# Altium PCB BuySellDisplay.PcbDoc (part 2 of 2)
Units mil, origin at the board's own origin, x right, y up, seen from the top; angles counter-clockwise.
Board outline 6000 x 4000 mil, 2 copper layers (Top Layer, Bottom Layer); 218 components, 207 nets, 568 pads, 108 vias.
Unrouted connection lines stored in the file: 273.
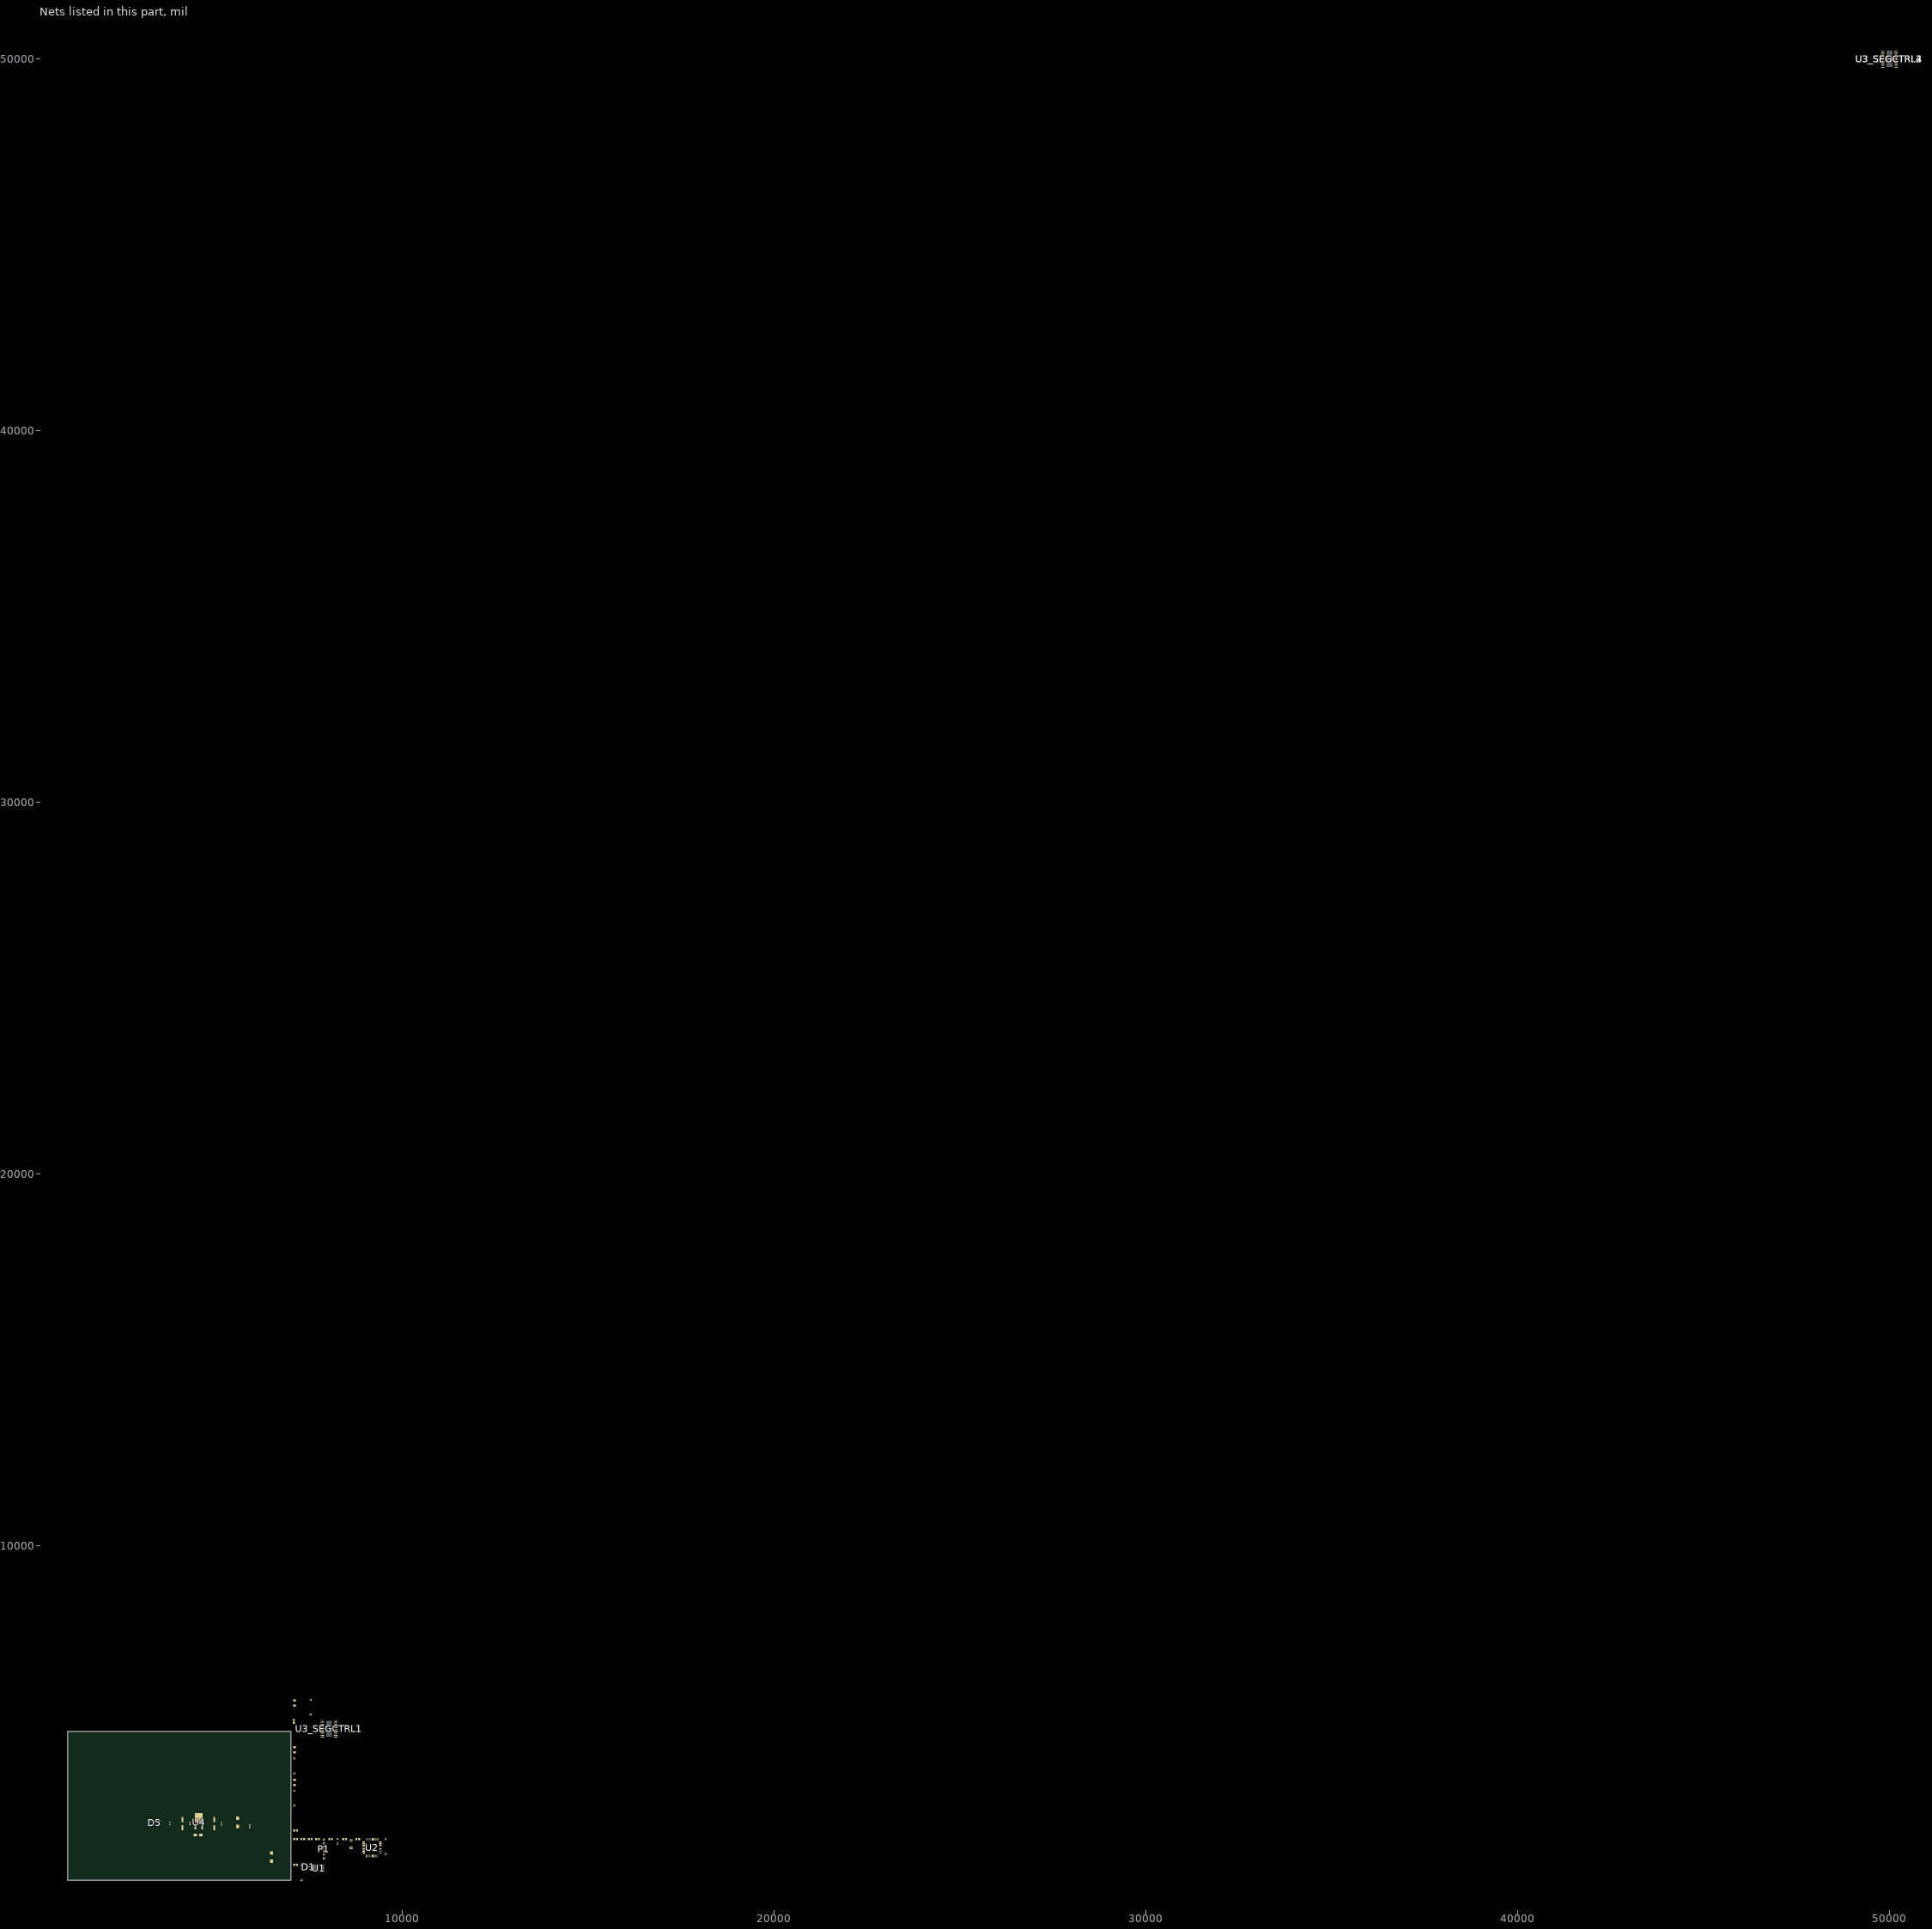
[diagram p2: the nets of this part, all layers, seen from the top]

## Components (designator, comment, footprint, x,y, rotation, side; value= is the part's Value field where it differs from the comment) (continued)
D2_DOT89 "LED2" 3.2X1.6X1.1 49999.5,49999.5 r0 top (schematic designator D2)
D2_DOT90 "LED2" 3.2X1.6X1.1 49999.5,49999.5 r0 top (schematic designator D2)
D2_DOT91 "LED2" 3.2X1.6X1.1 49999.5,49999.5 r0 top (schematic designator D2)
D2_DOT92 "LED2" 3.2X1.6X1.1 49999.5,49999.5 r0 top (schematic designator D2)
D2_DOT93 "LED2" 3.2X1.6X1.1 49999.5,49999.5 r0 top (schematic designator D2)
D2_DOT94 "LED2" 3.2X1.6X1.1 49999.5,49999.5 r0 top (schematic designator D2)
D2_DOT95 "LED2" 3.2X1.6X1.1 49999.5,49999.5 r0 top (schematic designator D2)
D2_DOT96 "LED2" 3.2X1.6X1.1 49999.5,49999.5 r0 top (schematic designator D2)
D2_DOT97 "LED2" 3.2X1.6X1.1 49999.5,49999.5 r0 top (schematic designator D2)
D2_DOT98 "LED2" 3.2X1.6X1.1 49999.5,49999.5 r0 top (schematic designator D2)
D2_DOT99 "LED2" 3.2X1.6X1.1 49999.5,49999.5 r0 top (schematic designator D2)
D2_DOT100 "LED2" 3.2X1.6X1.1 49999.5,49999.5 r0 top (schematic designator D2)
D2_DOT101 "LED2" 3.2X1.6X1.1 49999.5,49999.5 r0 top (schematic designator D2)
D2_DOT102 "LED2" 3.2X1.6X1.1 49999.5,49999.5 r0 top (schematic designator D2)
D2_DOT103 "LED2" 3.2X1.6X1.1 49999.5,49999.5 r0 top (schematic designator D2)
D2_DOT104 "LED2" 3.2X1.6X1.1 49999.5,49999.5 r0 top (schematic designator D2)
D2_DOT105 "LED2" 3.2X1.6X1.1 49999.5,49999.5 r0 top (schematic designator D2)
D2_DOT106 "LED2" 3.2X1.6X1.1 49999.5,49999.5 r0 top (schematic designator D2)
D2_DOT107 "LED2" 3.2X1.6X1.1 49999.5,49999.5 r0 top (schematic designator D2)
D2_DOT108 "LED2" 3.2X1.6X1.1 49999.5,49999.5 r0 top (schematic designator D2)
D2_DOT109 "LED2" 3.2X1.6X1.1 49999.5,49999.5 r0 top (schematic designator D2)
D2_DOT110 "LED2" 3.2X1.6X1.1 49999.5,49999.5 r0 top (schematic designator D2)
D2_DOT111 "LED2" 3.2X1.6X1.1 49999.5,49999.5 r0 top (schematic designator D2)
D2_DOT112 "LED2" 3.2X1.6X1.1 49999.5,49999.5 r0 top (schematic designator D2)
D2_DOT113 "LED2" 3.2X1.6X1.1 49999.5,49999.5 r0 top (schematic designator D2)
D2_DOT114 "LED2" 3.2X1.6X1.1 49999.5,49999.5 r0 top (schematic designator D2)
D2_DOT115 "LED2" 3.2X1.6X1.1 49999.5,49999.5 r0 top (schematic designator D2)
D2_DOT116 "LED2" 3.2X1.6X1.1 49999.5,49999.5 r0 top (schematic designator D2)
D2_DOT117 "LED2" 3.2X1.6X1.1 49999.5,49999.5 r0 top (schematic designator D2)
D2_DOT118 "LED2" 3.2X1.6X1.1 49999.5,49999.5 r0 top (schematic designator D2)
D2_DOT119 "LED2" 3.2X1.6X1.1 49999.5,49999.5 r0 top (schematic designator D2)
D2_DOT120 "LED2" 3.2X1.6X1.1 49999.5,49999.5 r0 top (schematic designator D2)
D2_DOT121 "LED2" 3.2X1.6X1.1 49999.5,49999.5 r0 top (schematic designator D2)
D2_DOT122 "LED2" 3.2X1.6X1.1 49999.5,49999.5 r0 top (schematic designator D2)
D2_DOT123 "LED2" 3.2X1.6X1.1 49999.5,49999.5 r0 top (schematic designator D2)
D2_DOT124 "LED2" 3.2X1.6X1.1 49999.5,49999.5 r0 top (schematic designator D2)
D2_DOT125 "LED2" 3.2X1.6X1.1 49999.5,49999.5 r0 top (schematic designator D2)
D2_DOT126 "LED2" 3.2X1.6X1.1 49999.5,49999.5 r0 top (schematic designator D2)
D2_DOT127 "LED2" 3.2X1.6X1.1 49999.5,49999.5 r0 top (schematic designator D2)
D2_DOT128 "LED2" 3.2X1.6X1.1 49999.5,49999.5 r0 top (schematic designator D2)
D2_DOT129 "LED2" 3.2X1.6X1.1 49999.5,49999.5 r0 top (schematic designator D2)
D2_DOT130 "LED2" 3.2X1.6X1.1 49999.5,49999.5 r0 top (schematic designator D2)
D2_DOT131 "LED2" 3.2X1.6X1.1 49999.5,49999.5 r0 top (schematic designator D2)
D2_DOT132 "LED2" 3.2X1.6X1.1 49999.5,49999.5 r0 top (schematic designator D2)
D2_DOT133 "LED2" 3.2X1.6X1.1 49999.5,49999.5 r0 top (schematic designator D2)
D2_DOT134 "LED2" 3.2X1.6X1.1 49999.5,49999.5 r0 top (schematic designator D2)
D2_DOT135 "LED2" 3.2X1.6X1.1 49999.5,49999.5 r0 top (schematic designator D2)
D2_DOT136 "LED2" 3.2X1.6X1.1 49999.5,49999.5 r0 top (schematic designator D2)
D2_DOT137 "LED2" 3.2X1.6X1.1 49999.5,49999.5 r0 top (schematic designator D2)
D2_DOT138 "LED2" 3.2X1.6X1.1 49999.5,49999.5 r0 top (schematic designator D2)
D2_DOT139 "LED2" 3.2X1.6X1.1 49999.5,49999.5 r0 top (schematic designator D2)
D2_DOT140 "LED2" 3.2X1.6X1.1 49999.5,49999.5 r0 top (schematic designator D2)
D2_DOT141 "LED2" 3.2X1.6X1.1 49999.5,49999.5 r0 top (schematic designator D2)
D2_DOT142 "LED2" 3.2X1.6X1.1 49999.5,49999.5 r0 top (schematic designator D2)
D2_DOT143 "LED2" 3.2X1.6X1.1 49999.5,49999.5 r0 top (schematic designator D2)
D2_DOT144 "LED2" 3.2X1.6X1.1 49999.5,49999.5 r0 top (schematic designator D2)
D3_IND1 "LED2" 3.2X1.6X1.1 7100,5765 r90 top (schematic designator D3)
D3_IND2 "LED2" 3.2X1.6X1.1 49999.5,49999.5 r0 top (schematic designator D3)
D3_IND3 "LED2" 3.2X1.6X1.1 49999.5,49999.5 r0 top (schematic designator D3)
D4 "S1M-E3/5AT" S1M-E3/5AT 4510,2215 r0 top
D5 "MB6S-E3/80" MB6S-E3/80 3345,2545 r0 top
D6 "150060YS75000" 150060YS75000 3745,2525 r270 top
D7 "SMBJ12A-E3/52" SMBJ5.0A 6480,1620 r90 top
D8 "SMBJ5.0A" SMBJ5.0A 5570,2555 r270 top
P1 "Header 6" HDR1X6 7890,1590 r90 top
R1 "Res2" AXIAL-0.4 7290,1205 r90 top
R2 "Res2" AXIAL-0.4 9550,1905 r90 top
R3_IND1 "Res2" AXIAL-0.4 7535,5655 r90 top (schematic designator R3)
R3_IND2 "Res2" AXIAL-0.4 49999.5,49999.5 r0 top (schematic designator R3)
R3_IND3 "Res2" AXIAL-0.4 49999.5,49999.5 r0 top (schematic designator R3)
R4_7SEG1 "Res2" AXIAL-0.4 7095,3205 r90 top (schematic designator R4)
R4_7SEG2 "Res2" AXIAL-0.4 49999.5,49999.5 r0 top (schematic designator R4)
R4_7SEG3 "Res2" AXIAL-0.4 49999.5,49999.5 r0 top (schematic designator R4)
R4_7SEG4 "Res2" AXIAL-0.4 49999.5,49999.5 r0 top (schematic designator R4)
R5_L1 "Res2" AXIAL-0.4 7095,4075 r90 top (schematic designator R5)
R5_L2 "Res2" AXIAL-0.4 49999.5,49999.5 r0 top (schematic designator R5)
R5_L3 "Res2" AXIAL-0.4 49999.5,49999.5 r0 top (schematic designator R5)
R5_L4 "Res2" AXIAL-0.4 49999.5,49999.5 r0 top (schematic designator R5)
R5_L5 "Res2" AXIAL-0.4 49999.5,49999.5 r0 top (schematic designator R5)
R5_L6 "Res2" AXIAL-0.4 49999.5,49999.5 r0 top (schematic designator R5)
R5_L7 "Res2" AXIAL-0.4 49999.5,49999.5 r0 top (schematic designator R5)
R5_L8 "Res2" AXIAL-0.4 49999.5,49999.5 r0 top (schematic designator R5)
R5_L9 "Res2" AXIAL-0.4 49999.5,49999.5 r0 top (schematic designator R5)
R5_L10 "Res2" AXIAL-0.4 49999.5,49999.5 r0 top (schematic designator R5)
R5_L11 "Res2" AXIAL-0.4 49999.5,49999.5 r0 top (schematic designator R5)
R5_L12 "Res2" AXIAL-0.4 49999.5,49999.5 r0 top (schematic designator R5)
R5_L13 "Res2" AXIAL-0.4 49999.5,49999.5 r0 top (schematic designator R5)
R5_L14 "Res2" AXIAL-0.4 49999.5,49999.5 r0 top (schematic designator R5)
R5_L15 "Res2" AXIAL-0.4 49999.5,49999.5 r0 top (schematic designator R5)
R5_L16 "Res2" AXIAL-0.4 49999.5,49999.5 r0 top (schematic designator R5)
R5_L17 "Res2" AXIAL-0.4 49999.5,49999.5 r0 top (schematic designator R5)
R5_L18 "Res2" AXIAL-0.4 49999.5,49999.5 r0 top (schematic designator R5)
R5_L19 "Res2" AXIAL-0.4 49999.5,49999.5 r0 top (schematic designator R5)
R5_L20 "Res2" AXIAL-0.4 49999.5,49999.5 r0 top (schematic designator R5)
R5_L21 "Res2" AXIAL-0.4 49999.5,49999.5 r0 top (schematic designator R5)
R5_L22 "Res2" AXIAL-0.4 49999.5,49999.5 r0 top (schematic designator R5)
R5_L23 "Res2" AXIAL-0.4 49999.5,49999.5 r0 top (schematic designator R5)
R5_L24 "Res2" AXIAL-0.4 49999.5,49999.5 r0 top (schematic designator R5)
R5_L25 "Res2" AXIAL-0.4 49999.5,49999.5 r0 top (schematic designator R5)
R5_L26 "Res2" AXIAL-0.4 49999.5,49999.5 r0 top (schematic designator R5)
R5_L27 "Res2" AXIAL-0.4 49999.5,49999.5 r0 top (schematic designator R5)
R5_L28 "Res2" AXIAL-0.4 49999.5,49999.5 r0 top (schematic designator R5)
R6 "CRCW2512470RJNEG" RES0603 5890,2455 r270 top
S1 "SW-PB" SPST-2 8620,1970 r90 top
U1 "MAX485CSA" NSO8_N 7755,1325 r0 top
U2 "ATmega1284P-AU" 44A_N 9185,1875 r0 top
U3_SEGCTRL1 "TPIC6B595" TPIC6B595DWR 8030,5075 r0 top (schematic designator U3)
U3_SEGCTRL2 "TPIC6B595" TPIC6B595DWR 49999.5,49999.5 r0 top (schematic designator U3)
U3_SEGCTRL3 "TPIC6B595" TPIC6B595DWR 49999.5,49999.5 r0 top (schematic designator U3)
U3_SEGCTRL4 "TPIC6B595" TPIC6B595DWR 49999.5,49999.5 r0 top (schematic designator U3)
U4 "MC7805CDTRKG" MC7805CDTRKG 4525,2585 r90 top
Y1 "XTAL" R38 8255,2050 r0 top

## Footprints (in the part's own frame and the unit in brackets; to place one, negate y for a bottom-side part, rotate by r counter-clockwise, add the part's x,y. Pads: shape width x height; smd on the part's side, far side on the other; paste and mask are expansions set on the pad)
3.2X1.6X1.1 [mm] "SMT LED; 2 Flat Leads"
  rect 1.5x1.5 smd: 1(-1.75,0) 2(1.75,0)
  silkscreen extent -2.9,-1.15 3.2,1.15
44A_N [mm] "Thin QFP, 44-Leads, Body 10x10mm, Pitch 0.8mm, IPC Medium Density"
  oval 1.75x0.55 smd: 1(-5.65,4) 2(-5.65,3.2) 3(-5.65,2.4) 4(-5.65,1.6) 5(-5.65,0.8) 6(-5.65,0) 7(-5.65,-0.8) 8(-5.65,-1.6) 9(-5.65,-2.4) 10(-5.65,-3.2) 11(-5.65,-4) 23(5.65,-4) 24(5.65,-3.2) 25(5.65,-2.4) 26(5.65,-1.6) 27(5.65,-0.8) 28(5.65,0) 29(5.65,0.8) 30(5.65,1.6) 31(5.65,2.4) 32(5.65,3.2) 33(5.65,4)
  oval 0.55x1.75 smd: 12(-4,-5.65) 13(-3.2,-5.65) 14(-2.4,-5.65) 15(-1.6,-5.65) 16(-0.8,-5.65) 17(0,-5.65) 18(0.8,-5.65) 19(1.6,-5.65) 20(2.4,-5.65) 21(3.2,-5.65) 22(4,-5.65) 34(4,5.65) 35(3.2,5.65) 36(2.4,5.65) 37(1.6,5.65) 38(0.8,5.65) 39(0,5.65) 40(-0.8,5.65) 41(-1.6,5.65) 42(-2.4,5.65) 43(-3.2,5.65) 44(-4,5.65)
  silkscreen extent -5.77,-4.35 4.35,4.95, body extent -5,-5 5,5, height 1.2
150060YS75000 [mm]
  rect 0.85x0.85 smd: 1(-0.8,0) 2(0.8,0)
  silkscreen extent -1.53,-0.33 -1.53,0.33, body extent -0.85,-0.45 0.85,0.45, height 2.44
AXIAL-0.4 [mm] "Resistor; 2 Leads"
  round 1.4 hole 0.85: 1(-5.08,0) 2(5.08,0)
  silkscreen extent -4.06,-1.02 4.06,1.02
C0805 [mm] "Chip Capacitor; Body 2.0 x 1.2 mm (LxW typ)"
  rect 1.3x1.5 smd: 1(-0.95,0) 2(0.95,0)
  silkscreen extent -1.9,-0.65 -1.9,0.65
CAP0603 [mm] "Capacitores cerámicos de capas múltiples (MLCC) - SMD/SMT 0603 0.1uF 16volts X7R 5%"
  rect 0.9x0.9 smd: 1(-0.8,0) 2(0.8,0)
  silkscreen extent -1.55,-0.35 0.15,0.35, body extent -0.83,-0.43 0.82,0.42, height 0.85
EEH-ZA1E101XP [mm] "EEH-ZA1E101XP"
  rect 3.5x1.2 smd: 1(-2.794,0) 2(2.794,0)
  silkscreen extent -3.5,-3.5 3.5,3.5
HDR1X6 [mm] "Connector; Header; 6 Position"
  rect 1.5x1.5 hole 0.9: 1(0,0)
  round 1.5 hole 0.9: 2(2.54,0) 3(5.08,0) 4(7.62,0) 5(10.16,0) 6(12.7,0)
  silkscreen extent -1.27,-1.27 13.97,1.27
MB6S-E3/80 [mm] "MB6S-E3/80"
  rect 1.7x0.85 smd: 1(-3,1.335) 2(-3,-1.335) 3(3,-1.335) 4(3,1.335)
  silkscreen extent -3.12,-2.45 2.05,2.45, body extent -2.05,-2.47 2.05,2.48, height 2.9
MC7805CDTRKG [mm] "MC7805CDTRKG"
  rect 3.05x1.25 smd: 1(-4.05,2.29) 3(-4.05,-2.29)
  rect 6.5x5.55 smd: 4(2.4,0)
  silkscreen extent -4.17,-3.35 -1.25,3.59, body extent -2.5,-3.37 3.72,3.37, height 2.38
NSO8_N [mm] "SOIC, 8-Leads, Body 4.9x3.9mm, Pitch 1.27mm, IPC Medium Density"
  oval 2.2x0.6 smd: 1(-2.4,1.905) 2(-2.4,0.635) 3(-2.4,-0.635) 4(-2.4,-1.905) 5(2.4,-1.905) 6(2.4,-0.635) 7(2.4,0.635) 8(2.4,1.905)
  silkscreen extent -2.52,-2.5 0.9,2.88, body extent -1.95,-2.45 1.95,2.45, height 1.75
R38 [mm] "Crystal, Thru-Hole; 2 Leads; Body 3.1 x 8.2 mm (Dia.xH)"
  round 1.3 hole 0.7: 1(0,1.55) 2(0,-1.55)
  silkscreen extent -1.55,-1.19 1.55,1.17
RES0603 [mm]
  rect 1x1 smd: 1(-0.85,0) 2(0.85,0)
  silkscreen extent -0.15,-0.4 0.15,0.4, body extent -0.9,-0.45 0.9,0.45, height 0.55
S1M-E3/5AT [mm] "S1M-E3/5AT"
  rect 2.35x1.55 smd: 1(-1.975,0) 2(1.975,0)
  silkscreen extent -3.42,-1.4 2.65,1.45, body extent -2.64,-1.4 2.64,1.39, height 2.29
SMBJ5.0A [mm]
  rect 2.35x2.2 smd: 1(-2.8,0) 2(2.8,0)
  silkscreen extent -3.57,-2 2.8,2, body extent -2.8,-1.97 2.79,1.97, height 2.44
SPST-2 [mm] "Circuit Breaker; 2 Leads"
  rect 1.85x1.85 hole 1.1: 1(-2.54,0)
  round 1.85 hole 1.1: 2(2.54,0)
  silkscreen extent -4.89,-1.27 4.28,1.27
SW712 [mm] "SM712 Series 600W Asymmetrical TVS Diode Array"
  rect 1.6x0.6 smd: 1(-0.9,0.95) 2(-0.9,-0.95) 3(0.9,0)
  silkscreen extent -1.02,-1.5 0.7,1.92, body extent -0.7,-1.52 0.7,1.52, height 1.12
TPIC6B595DWR [mm] "SOIC, 20-Leads, Body 13.0x7.6mm (max), Pitch 1.27mm, IPC Medium Density"
  oval 2.3x0.6 smd: 1(-4.55,5.715) 2(-4.55,4.445) 3(-4.55,3.175) 4(-4.55,1.905) 5(-4.55,0.635) 6(-4.55,-0.635) 7(-4.55,-1.905) 8(-4.55,-3.175) 9(-4.55,-4.445) 10(-4.55,-5.715) 11(4.55,-5.715) 12(4.55,-4.445) 13(4.55,-3.175) 14(4.55,-1.905) 15(4.55,-0.635) 16(4.55,0.635) 17(4.55,1.905) 18(4.55,3.175) 19(4.55,4.445) 20(4.55,5.715)
  rect 3.9x11 smd: 21(0,0)
  silkscreen extent -4.67,-6.5 3,6.69, body extent -3.8,-6.5 3.8,6.5, height 2.65

## Part data
C1 C2 C3 C4 C5 C6 C7 C8 C9 C10_SEGCTRL1 C10_SEGCTRL2 C10_SEGCTRL3 C10_SEGCTRL4: "Polarized Capacitor (Surface Mount)"
C13 C14: library part C0.1UF, "Capacitores cerámicos de capas múltiples (MLCC) - SMD/SMT 0603 0.1uF 16volts X7R 5%"
D2_DOT1 D2_DOT2 D2_DOT3 D2_DOT4 D2_DOT5 D2_DOT6 D2_DOT7 D2_DOT8 D2_DOT9 D2_DOT10 D2_DOT11 D2_DOT12 D2_DOT13 D2_DOT14 D2_DOT15 D2_DOT16 D2_DOT17 D2_DOT18 D2_DOT19 D2_DOT20 D2_DOT21 D2_DOT22 D2_DOT23 D2_DOT24 D2_DOT25 D2_DOT26 D2_DOT27 D2_DOT28 D2_DOT29 D2_DOT30 D2_DOT31 D2_DOT32 D2_DOT33 D2_DOT34 D2_DOT35 D2_DOT36 D2_DOT37 D2_DOT38 D2_DOT39 D2_DOT40 D2_DOT41 D2_DOT42 D2_DOT43 D2_DOT44 D2_DOT45 D2_DOT46 D2_DOT47 D2_DOT48 D2_DOT49 D2_DOT50 D2_DOT51 D2_DOT52 D2_DOT53 D2_DOT54 D2_DOT55 D2_DOT56 D2_DOT57 D2_DOT58 D2_DOT59 D2_DOT60 D2_DOT61 D2_DOT62 D2_DOT63 D2_DOT64 D2_DOT65 D2_DOT66 D2_DOT67 D2_DOT68 D2_DOT69 D2_DOT70 D2_DOT71 D2_DOT72 D2_DOT73 D2_DOT74 D2_DOT75 D2_DOT76 D2_DOT77 D2_DOT78 D2_DOT79 D2_DOT80 D2_DOT81 D2_DOT82 D2_DOT83 D2_DOT84 D2_DOT85 D2_DOT86 D2_DOT87 D2_DOT88 D2_DOT89 D2_DOT90 D2_DOT91 D2_DOT92 D2_DOT93 D2_DOT94 D2_DOT95 D2_DOT96 D2_DOT97 D2_DOT98 D2_DOT99 D2_DOT100 D2_DOT101 D2_DOT102 D2_DOT103 D2_DOT104 D2_DOT105 D2_DOT106 D2_DOT107 D2_DOT108 D2_DOT109 D2_DOT110 D2_DOT111 D2_DOT112 D2_DOT113 D2_DOT114 D2_DOT115 D2_DOT116 D2_DOT117 D2_DOT118 D2_DOT119 D2_DOT120 D2_DOT121 D2_DOT122 D2_DOT123 D2_DOT124 D2_DOT125 D2_DOT126 D2_DOT127 D2_DOT128 D2_DOT129 D2_DOT130 D2_DOT131 D2_DOT132 D2_DOT133 D2_DOT134 D2_DOT135 D2_DOT136 D2_DOT137 D2_DOT138 D2_DOT139 D2_DOT140 D2_DOT141 D2_DOT142 D2_DOT143 D2_DOT144 D3_IND1 D3_IND2 D3_IND3: "Typical RED, GREEN, YELLOW, AMBER GaAs LED"
D6: library part SMBJ12A-E3/52, "NPN General Purpose Amplifier"
D7 D8: "NPN General Purpose Amplifier"
P1: "Header, 6-Pin"
R1 R2 R3_IND1 R3_IND2 R3_IND3 R4_7SEG1 R4_7SEG2 R4_7SEG3 R4_7SEG4 R5_L1 R5_L2 R5_L3 R5_L4 R5_L5 R5_L6 R5_L7 R5_L8 R5_L9 R5_L10 R5_L11 R5_L12 R5_L13 R5_L14 R5_L15 R5_L16 R5_L17 R5_L18 R5_L19 R5_L20 R5_L21 R5_L22 R5_L23 R5_L24 R5_L25 R5_L26 R5_L27 R5_L28: "Resistor"
S1: "Switch"
U1: "Low-Power, Slew-Rate-Limited RS-485/RS-422 Transceiver"
U2: "20 MHz 8-bit AVR Microcontroller with 128KB Flash, 44-Pin TQFP Pkg, Industrial Temp"
U3_SEGCTRL1 U3_SEGCTRL2 U3_SEGCTRL3 U3_SEGCTRL4: library part TPIC6B595DWR, "HIGH POWER SHIFT REGISTER"
Y1: "Crystal Oscillator"

## Via types
v1: diameter 25.98, hole 12.99, Top Layer to Bottom Layer, tented top, 108 vias

## Nets (pads, with @x,y where several pads share a name; then routed paths per layer and width w, separated by ;. In a path a pad name is that pad's centre, name@x,y a point inside that pad or via, vN(x,y) a via of type N, cw(c..) or ccw(c..) an arc to the next point about the centre after c; other vN are vias at no path point)
20MHZ_1: C3.1 U2.8 Y1.2
20MHZ_2: C4.1 U2.7 Y1.1
A: D1.1 U1.6
B: D1.2 U1.7
CLK: P1.3 U2.3 U3_SEGCTRL1.13 U3_SEGCTRL2.13 U3_SEGCTRL3.13 U3_SEGCTRL4.13
COM_485_EN: R1.1 U1.2 U1.3 U2.34
DI: D3_IND1.2 U1.4 U2.10
DOT_7SEG1: R4_7SEG1.2 U3_SEGCTRL1.17
DOT_7SEG2: R4_7SEG2.2 U3_SEGCTRL2.17
DOT_7SEG3: R4_7SEG3.2 U3_SEGCTRL3.17
DOT_7SEG4: R4_7SEG4.2 U3_SEGCTRL4.17
EXTSUPP: C9.1 C11.1 C13.1 D2_DOT1.1 D2_DOT6.1 D2_DOT11.1 D2_DOT16.1 D2_DOT21.1 D2_DOT26.1 D2_DOT31.1 D2_DOT36.1 D2_DOT37.1 D2_DOT42.1 D2_DOT47.1 D2_DOT52.1 D2_DOT57.1 D2_DOT62.1 D2_DOT67.1 D2_DOT72.1 D2_DOT73.1 D2_DOT78.1 D2_DOT83.1 D2_DOT88.1 D2_DOT93.1 D2_DOT98.1 D2_DOT103.1 D2_DOT108.1 D2_DOT109.1 D2_DOT114.1 D2_DOT119.1 D2_DOT124.1 D2_DOT129.1 D2_DOT134.1 D2_DOT139.1 D2_DOT144.1 D4.1 D5.4 D6.1 D7.1 U4.1
GND: C1.2 C2.2 C3.2 C4.2 C5.2 C6.2 C7.2 C8.2 C9.2 C10_SEGCTRL1.2 C10_SEGCTRL2.2 C10_SEGCTRL3.2 C10_SEGCTRL4.2 C11.2 C12.2 C13.2 C14.2 D1.3 D5.3 D7.2 D8.2 P1.6 R1.2 R6.2 S1.2 U1.5 U2.6 U2.18 U2.28 U2.39 U3_SEGCTRL1.9 U3_SEGCTRL1.10 U3_SEGCTRL1.11 U3_SEGCTRL1.19 U3_SEGCTRL2.9 U3_SEGCTRL2.10 U3_SEGCTRL2.11 U3_SEGCTRL2.19 U3_SEGCTRL3.9 U3_SEGCTRL3.10 U3_SEGCTRL3.11 U3_SEGCTRL3.19 U3_SEGCTRL4.9 U3_SEGCTRL4.10 U3_SEGCTRL4.11 U3_SEGCTRL4.19 U4.4
IND: D3_IND3.2 U2.19
INPUT: P1.1 U2.1 U3_SEGCTRL4.3
MISO: P1.2 U2.2 U3_SEGCTRL1.18
NetD2_DOT1_2: D2_DOT1.2 R4_7SEG1.1
NetD2_DOT2_1: D2_DOT2.1 D2_DOT3.2
NetD2_DOT2_2: D2_DOT2.2 R5_L1.1
NetD2_DOT3_1: D2_DOT3.1 D2_DOT4.2
NetD2_DOT4_1: D2_DOT4.1 D2_DOT5.2
NetD2_DOT5_1: D2_DOT5.1 D2_DOT6.2
NetD2_DOT7_1: D2_DOT7.1 D2_DOT8.2
NetD2_DOT7_2: D2_DOT7.2 R5_L2.1
NetD2_DOT8_1: D2_DOT8.1 D2_DOT9.2
NetD2_DOT9_1: D2_DOT9.1 D2_DOT10.2
NetD2_DOT10_1: D2_DOT10.1 D2_DOT11.2
NetD2_DOT12_1: D2_DOT12.1 D2_DOT13.2
NetD2_DOT12_2: D2_DOT12.2 R5_L3.1
NetD2_DOT13_1: D2_DOT13.1 D2_DOT14.2
NetD2_DOT14_1: D2_DOT14.1 D2_DOT15.2
NetD2_DOT15_1: D2_DOT15.1 D2_DOT16.2
NetD2_DOT17_1: D2_DOT17.1 D2_DOT18.2
NetD2_DOT17_2: D2_DOT17.2 R5_L4.1
NetD2_DOT18_1: D2_DOT18.1 D2_DOT19.2
NetD2_DOT19_1: D2_DOT19.1 D2_DOT20.2
NetD2_DOT20_1: D2_DOT20.1 D2_DOT21.2
NetD2_DOT22_1: D2_DOT22.1 D2_DOT23.2
NetD2_DOT22_2: D2_DOT22.2 R5_L5.1
NetD2_DOT23_1: D2_DOT23.1 D2_DOT24.2
NetD2_DOT24_1: D2_DOT24.1 D2_DOT25.2
NetD2_DOT25_1: D2_DOT25.1 D2_DOT26.2
NetD2_DOT27_1: D2_DOT27.1 D2_DOT28.2
NetD2_DOT27_2: D2_DOT27.2 R5_L6.1
NetD2_DOT28_1: D2_DOT28.1 D2_DOT29.2
NetD2_DOT29_1: D2_DOT29.1 D2_DOT30.2
NetD2_DOT30_1: D2_DOT30.1 D2_DOT31.2
NetD2_DOT32_1: D2_DOT32.1 D2_DOT33.2
NetD2_DOT32_2: D2_DOT32.2 R5_L7.1
NetD2_DOT33_1: D2_DOT33.1 D2_DOT34.2
NetD2_DOT34_1: D2_DOT34.1 D2_DOT35.2
NetD2_DOT35_1: D2_DOT35.1 D2_DOT36.2
NetD2_DOT37_2: D2_DOT37.2 R4_7SEG2.1
NetD2_DOT38_1: D2_DOT38.1 D2_DOT39.2
NetD2_DOT38_2: D2_DOT38.2 R5_L8.1
NetD2_DOT39_1: D2_DOT39.1 D2_DOT40.2
NetD2_DOT40_1: D2_DOT40.1 D2_DOT41.2
NetD2_DOT41_1: D2_DOT41.1 D2_DOT42.2
NetD2_DOT43_1: D2_DOT43.1 D2_DOT44.2
NetD2_DOT43_2: D2_DOT43.2 R5_L9.1
NetD2_DOT44_1: D2_DOT44.1 D2_DOT45.2
NetD2_DOT45_1: D2_DOT45.1 D2_DOT46.2
NetD2_DOT46_1: D2_DOT46.1 D2_DOT47.2
NetD2_DOT48_1: D2_DOT48.1 D2_DOT49.2
NetD2_DOT48_2: D2_DOT48.2 R5_L10.1
NetD2_DOT49_1: D2_DOT49.1 D2_DOT50.2
NetD2_DOT50_1: D2_DOT50.1 D2_DOT51.2
NetD2_DOT51_1: D2_DOT51.1 D2_DOT52.2
NetD2_DOT53_1: D2_DOT53.1 D2_DOT54.2
NetD2_DOT53_2: D2_DOT53.2 R5_L11.1
NetD2_DOT54_1: D2_DOT54.1 D2_DOT55.2
NetD2_DOT55_1: D2_DOT55.1 D2_DOT56.2
NetD2_DOT56_1: D2_DOT56.1 D2_DOT57.2
NetD2_DOT58_1: D2_DOT58.1 D2_DOT59.2
NetD2_DOT58_2: D2_DOT58.2 R5_L12.1
NetD2_DOT59_1: D2_DOT59.1 D2_DOT60.2
NetD2_DOT60_1: D2_DOT60.1 D2_DOT61.2
NetD2_DOT61_1: D2_DOT61.1 D2_DOT62.2
NetD2_DOT63_1: D2_DOT63.1 D2_DOT64.2
NetD2_DOT63_2: D2_DOT63.2 R5_L13.1
NetD2_DOT64_1: D2_DOT64.1 D2_DOT65.2
NetD2_DOT65_1: D2_DOT65.1 D2_DOT66.2
NetD2_DOT66_1: D2_DOT66.1 D2_DOT67.2
NetD2_DOT68_1: D2_DOT68.1 D2_DOT69.2
NetD2_DOT68_2: D2_DOT68.2 R5_L14.1
NetD2_DOT69_1: D2_DOT69.1 D2_DOT70.2
NetD2_DOT70_1: D2_DOT70.1 D2_DOT71.2
NetD2_DOT71_1: D2_DOT71.1 D2_DOT72.2
NetD2_DOT73_2: D2_DOT73.2 R4_7SEG3.1
NetD2_DOT74_1: D2_DOT74.1 D2_DOT75.2
NetD2_DOT74_2: D2_DOT74.2 R5_L15.1
NetD2_DOT75_1: D2_DOT75.1 D2_DOT76.2
NetD2_DOT76_1: D2_DOT76.1 D2_DOT77.2
NetD2_DOT77_1: D2_DOT77.1 D2_DOT78.2
NetD2_DOT79_1: D2_DOT79.1 D2_DOT80.2
NetD2_DOT79_2: D2_DOT79.2 R5_L16.1
NetD2_DOT80_1: D2_DOT80.1 D2_DOT81.2
NetD2_DOT81_1: D2_DOT81.1 D2_DOT82.2
NetD2_DOT82_1: D2_DOT82.1 D2_DOT83.2
NetD2_DOT84_1: D2_DOT84.1 D2_DOT85.2
NetD2_DOT84_2: D2_DOT84.2 R5_L17.1
NetD2_DOT85_1: D2_DOT85.1 D2_DOT86.2
NetD2_DOT86_1: D2_DOT86.1 D2_DOT87.2
NetD2_DOT87_1: D2_DOT87.1 D2_DOT88.2
NetD2_DOT89_1: D2_DOT89.1 D2_DOT90.2
NetD2_DOT89_2: D2_DOT89.2 R5_L18.1
NetD2_DOT90_1: D2_DOT90.1 D2_DOT91.2
NetD2_DOT91_1: D2_DOT91.1 D2_DOT92.2
NetD2_DOT92_1: D2_DOT92.1 D2_DOT93.2
NetD2_DOT94_1: D2_DOT94.1 D2_DOT95.2
NetD2_DOT94_2: D2_DOT94.2 R5_L19.1
NetD2_DOT95_1: D2_DOT95.1 D2_DOT96.2
NetD2_DOT96_1: D2_DOT96.1 D2_DOT97.2
NetD2_DOT97_1: D2_DOT97.1 D2_DOT98.2
NetD2_DOT99_1: D2_DOT99.1 D2_DOT100.2
NetD2_DOT99_2: D2_DOT99.2 R5_L20.1
NetD2_DOT100_1: D2_DOT100.1 D2_DOT101.2
NetD2_DOT101_1: D2_DOT101.1 D2_DOT102.2
NetD2_DOT102_1: D2_DOT102.1 D2_DOT103.2
NetD2_DOT104_1: D2_DOT104.1 D2_DOT105.2
NetD2_DOT104_2: D2_DOT104.2 R5_L21.1
NetD2_DOT105_1: D2_DOT105.1 D2_DOT106.2
NetD2_DOT106_1: D2_DOT106.1 D2_DOT107.2
NetD2_DOT107_1: D2_DOT107.1 D2_DOT108.2
NetD2_DOT109_2: D2_DOT109.2 R4_7SEG4.1
NetD2_DOT110_1: D2_DOT110.1 D2_DOT111.2
NetD2_DOT110_2: D2_DOT110.2 R5_L22.1
NetD2_DOT111_1: D2_DOT111.1 D2_DOT112.2
NetD2_DOT112_1: D2_DOT112.1 D2_DOT113.2
NetD2_DOT113_1: D2_DOT113.1 D2_DOT114.2
NetD2_DOT115_1: D2_DOT115.1 D2_DOT116.2
NetD2_DOT115_2: D2_DOT115.2 R5_L23.1
NetD2_DOT116_1: D2_DOT116.1 D2_DOT117.2
NetD2_DOT117_1: D2_DOT117.1 D2_DOT118.2
NetD2_DOT118_1: D2_DOT118.1 D2_DOT119.2
NetD2_DOT120_1: D2_DOT120.1 D2_DOT121.2
NetD2_DOT120_2: D2_DOT120.2 R5_L24.1
NetD2_DOT121_1: D2_DOT121.1 D2_DOT122.2
NetD2_DOT122_1: D2_DOT122.1 D2_DOT123.2
NetD2_DOT123_1: D2_DOT123.1 D2_DOT124.2
NetD2_DOT125_1: D2_DOT125.1 D2_DOT126.2
NetD2_DOT125_2: D2_DOT125.2 R5_L25.1
NetD2_DOT126_1: D2_DOT126.1 D2_DOT127.2
NetD2_DOT127_1: D2_DOT127.1 D2_DOT128.2
NetD2_DOT128_1: D2_DOT128.1 D2_DOT129.2
NetD2_DOT130_1: D2_DOT130.1 D2_DOT131.2
NetD2_DOT130_2: D2_DOT130.2 R5_L26.1
NetD2_DOT131_1: D2_DOT131.1 D2_DOT132.2
NetD2_DOT132_1: D2_DOT132.1 D2_DOT133.2
NetD2_DOT133_1: D2_DOT133.1 D2_DOT134.2
NetD2_DOT135_1: D2_DOT135.1 D2_DOT136.2
NetD2_DOT135_2: D2_DOT135.2 R5_L27.1
NetD2_DOT136_1: D2_DOT136.1 D2_DOT137.2
NetD2_DOT137_1: D2_DOT137.1 D2_DOT138.2
NetD2_DOT138_1: D2_DOT138.1 D2_DOT139.2
NetD2_DOT140_1: D2_DOT140.1 D2_DOT141.2
NetD2_DOT140_2: D2_DOT140.2 R5_L28.1
NetD2_DOT141_1: D2_DOT141.1 D2_DOT142.2
NetD2_DOT142_1: D2_DOT142.1 D2_DOT143.2
NetD2_DOT143_1: D2_DOT143.1 D2_DOT144.2
NetD3_IND1_1: D3_IND1.1 R3_IND1.1
NetD3_IND2_1: D3_IND2.1 R3_IND2.1
NetD3_IND3_1: D3_IND3.1 R3_IND3.1
NetD6_1: R6.1
NetU3_SEGCTRL1_3: U3_SEGCTRL1.3 U3_SEGCTRL2.18
NetU3_SEGCTRL2_3: U3_SEGCTRL2.3 U3_SEGCTRL3.18
NetU3_SEGCTRL3_3: U3_SEGCTRL3.3 U3_SEGCTRL4.18
PIN_A: U2.33
PIN_B: U2.32
PIN_C: U2.31
PIN_D: U2.30
POWER_V+: D5.1
POWER_V-: D5.2
RCK: U2.37 U3_SEGCTRL1.12 U3_SEGCTRL2.12 U3_SEGCTRL3.12 U3_SEGCTRL4.12
RO: D3_IND2.2 U1.1 U2.9
RST: C2.1 P1.4 R2.1 S1.1 U2.4
SEGA_7SEG1: R5_L7.2 U3_SEGCTRL1.5
SEGA_7SEG2: R5_L14.2 U3_SEGCTRL2.5
SEGA_7SEG3: R5_L21.2 U3_SEGCTRL3.5
SEGA_7SEG4: R5_L28.2 U3_SEGCTRL4.5
SEGB_7SEG1: R5_L5.2 U3_SEGCTRL1.4
SEGB_7SEG2: R5_L12.2 U3_SEGCTRL2.4
SEGB_7SEG3: R5_L19.2 U3_SEGCTRL3.4
SEGB_7SEG4: R5_L26.2 U3_SEGCTRL4.4
SEGC_7SEG1: R5_L6.2 U3_SEGCTRL1.15
SEGC_7SEG2: R5_L13.2 U3_SEGCTRL2.15
SEGC_7SEG3: R5_L20.2 U3_SEGCTRL3.15
SEGC_7SEG4: R5_L27.2 U3_SEGCTRL4.15
SEGD_7SEG1: R5_L4.2 U3_SEGCTRL1.14
SEGD_7SEG2: R5_L11.2 U3_SEGCTRL2.14
SEGD_7SEG3: R5_L18.2 U3_SEGCTRL3.14
SEGD_7SEG4: R5_L25.2 U3_SEGCTRL4.14
SEGE_7SEG1: R5_L3.2 U3_SEGCTRL1.6
SEGE_7SEG2: R5_L10.2 U3_SEGCTRL2.6
SEGE_7SEG3: R5_L17.2 U3_SEGCTRL3.6
SEGE_7SEG4: R5_L24.2 U3_SEGCTRL4.6
SEGF_7SEG1: R5_L2.2 U3_SEGCTRL1.16
SEGF_7SEG2: R5_L9.2 U3_SEGCTRL2.16
SEGF_7SEG3: R5_L16.2 U3_SEGCTRL3.16
SEGF_7SEG4: R5_L23.2 U3_SEGCTRL4.16
SEGG_7SEG1: R5_L1.2 U3_SEGCTRL1.7
SEGG_7SEG2: R5_L8.2 U3_SEGCTRL2.7
SEGG_7SEG3: R5_L15.2 U3_SEGCTRL3.7
SEGG_7SEG4: R5_L22.2 U3_SEGCTRL4.7
USART1_RX: U2.11
USART1_TX: U2.12
VCC: C1.1 C5.1 C6.1 C7.1 C8.1 C10_SEGCTRL1.1 C10_SEGCTRL2.1 C10_SEGCTRL3.1 C10_SEGCTRL4.1 C12.1 C14.1 D4.2 D6.2 D8.1 P1.5 R2.2 R3_IND1.2 R3_IND2.2 R3_IND3.2 U1.8 U2.5 U2.17 U2.27 U2.38 U3_SEGCTRL1.2 U3_SEGCTRL1.8 U3_SEGCTRL2.2 U3_SEGCTRL2.8 U3_SEGCTRL3.2 U3_SEGCTRL3.8 U3_SEGCTRL4.2 U3_SEGCTRL4.8 U4.3
pads on no net: U2.13 U2.14 U2.15 U2.16 U2.20 U2.21 U2.22 U2.23 U2.24 U2.25 U2.26 U2.29 U2.35 U2.36 U2.40 U2.41 U2.42 U2.43 U2.44 U3_SEGCTRL1.1 U3_SEGCTRL1.20 U3_SEGCTRL1.21 U3_SEGCTRL2.1 U3_SEGCTRL2.20 U3_SEGCTRL2.21 U3_SEGCTRL3.1 U3_SEGCTRL3.20 U3_SEGCTRL3.21 U3_SEGCTRL4.1 U3_SEGCTRL4.20 U3_SEGCTRL4.21
copper on no net:
  other v1: 7982.76,4886.02 8030,4886.02 8077.24,4886.02 7982.76,4933.27 8030,4933.27 8077.24,4933.27 7982.76,4980.51 8030,4980.51 8077.24,4980.51 7982.76,5027.76 8030,5027.76 8077.24,5027.76 7982.76,5075 8030,5075 8077.24,5075 7982.76,5122.24 8030,5122.24 8077.24,5122.24 7982.76,5169.49 8030,5169.49 8077.24,5169.49 7982.76,5216.73 8030,5216.73 8077.24,5216.73 7982.76,5263.98 8030,5263.98 8077.24,5263.98 49952.26,49810.52 49952.26,49810.52 49952.26,49810.52 49999.5,49810.52 49999.5,49810.52 49999.5,49810.52 50046.74,49810.52 50046.74,49810.52 50046.74,49810.52 49952.26,49857.77 49952.26,49857.77 49952.26,49857.77 49999.5,49857.77 49999.5,49857.77 49999.5,49857.77 50046.74,49857.77 50046.74,49857.77 50046.74,49857.77 49952.26,49905.01 49952.26,49905.01 49952.26,49905.01 49999.5,49905.01 49999.5,49905.01 49999.5,49905.01 50046.74,49905.01 50046.74,49905.01 50046.74,49905.01 49952.26,49952.26 49952.26,49952.26 49952.26,49952.26 49999.5,49952.26 49999.5,49952.26 49999.5,49952.26 50046.74,49952.26 50046.74,49952.26 50046.74,49952.26 49952.26,49999.5 49952.26,49999.5 49952.26,49999.5 49999.5,49999.5 49999.5,49999.5 49999.5,49999.5 50046.74,49999.5 50046.74,49999.5 50046.74,49999.5 49952.26,50046.74 49952.26,50046.74 49952.26,50046.74 49999.5,50046.74 49999.5,50046.74 49999.5,50046.74 50046.74,50046.74 50046.74,50046.74 50046.74,50046.74 49952.26,50093.99 49952.26,50093.99 49952.26,50093.99 49999.5,50093.99 49999.5,50093.99 49999.5,50093.99 50046.74,50093.99 50046.74,50093.99 50046.74,50093.99 49952.26,50141.23 49952.26,50141.23 49952.26,50141.23 49999.5,50141.23 49999.5,50141.23 49999.5,50141.23 50046.74,50141.23 50046.74,50141.23 50046.74,50141.23 49952.26,50188.48 49952.26,50188.48 49952.26,50188.48 49999.5,50188.48 49999.5,50188.48 49999.5,50188.48 50046.74,50188.48 50046.74,50188.48 50046.74,50188.48

## Text inside footprints (layer, text, board x,y; h text height)
C11: Top Overlay "+" at 3940,2725 h98.43 r270
C12: Top Overlay "+" at 4800,2725 h98.43 r270
D5: Top Overlay "~" at 3280,2585 h60; Top Overlay "~" at 3280,2480 h60; Top Overlay "+" at 3380,2585 h60; Top Overlay "-" at 3385,2475 h60